# EAGLE board so2walker (EAGLE 6.6.0)
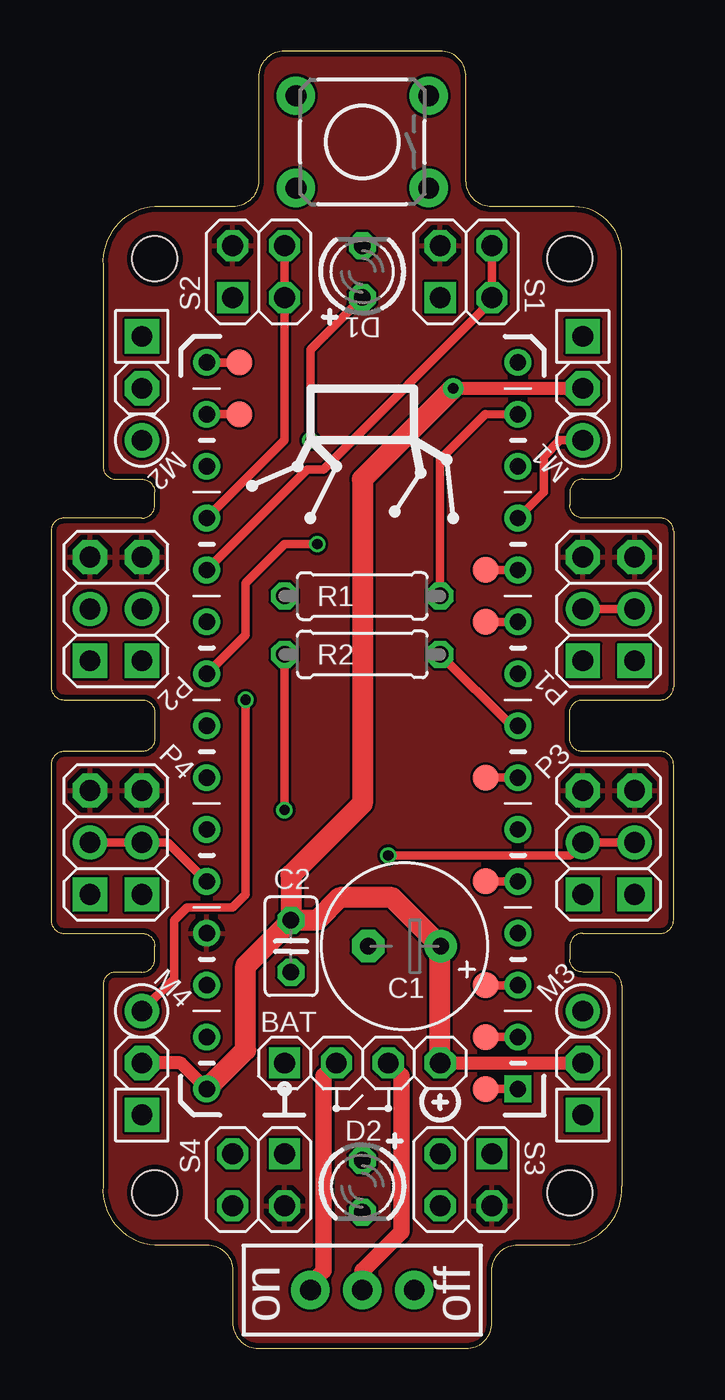
[diagram p0: board, top side]
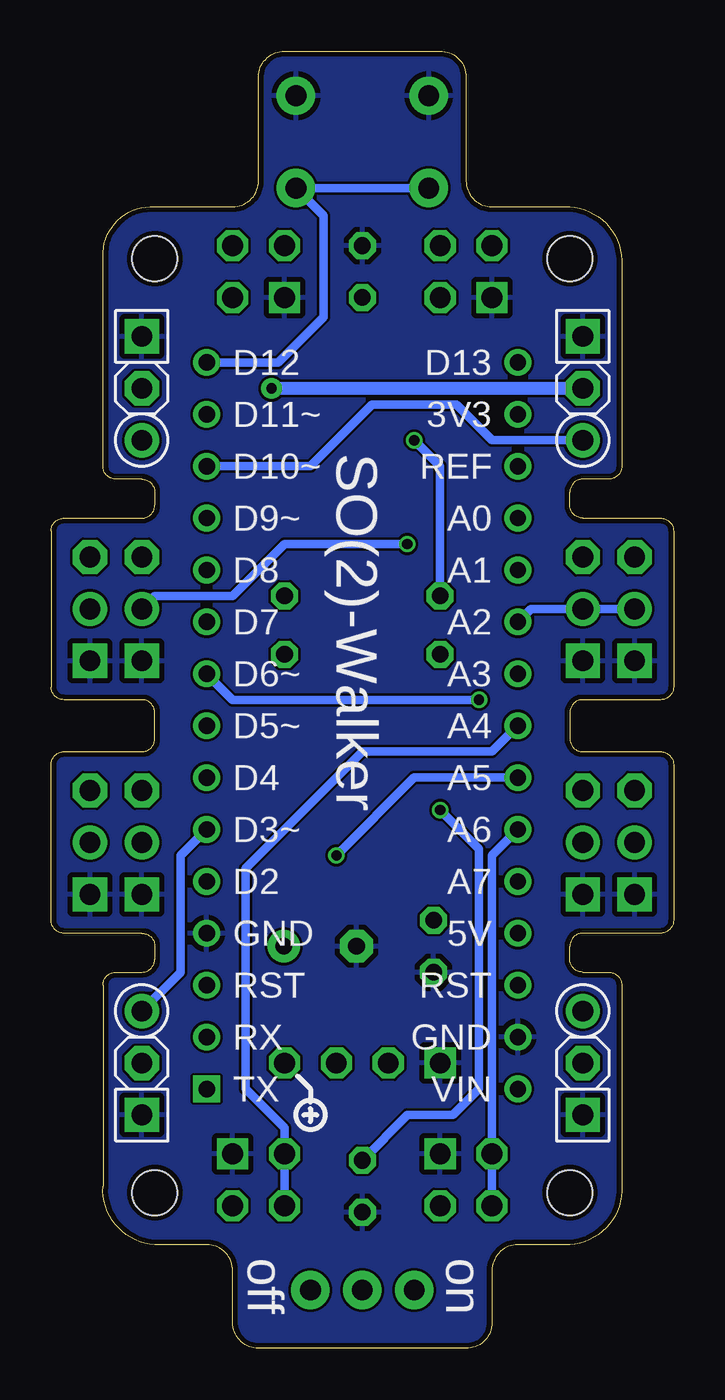
[diagram p1: board, bottom side, seen from below]

Size 30.48 x 63.5 mm. Coordinates in mm from the lower left corner, seen from the top.
Outline: 2.54,7.94 arc90 5.08,5.08 7.62,5.08 arc-90 8.89,3.81 8.89,1.27 arc90 10.16,0 20.32,0 arc90 21.59,1.27 21.59,3.81 arc-90 22.86,5.08 25.4,5.08 arc90 27.94,7.94 27.94,17.78 arc90 27.3,18.41 26.04,18.41 arc-90 25.4,19.05 25.4,19.68 arc-90 26.04,20.32 29.84,20.32 arc90 30.48,20.95 30.48,28.57 arc90 29.84,29.21 26.04,29.21 arc-90 25.4,29.84 25.4,31.11 arc-90 26.04,31.75 29.84,31.75 arc90 30.48,32.38 30.48,40.01 arc90 29.84,40.64 26.04,40.64 arc-90 25.4,41.27 25.4,41.91 arc-90 26.04,42.55 27.3,42.55 arc90 27.94,43.18 27.94,53.66 arc90 25.4,55.88 21.59,55.88 arc-90 20.32,57.15 20.32,62.23 arc90 19.05,63.5 11.43,63.5 arc90 10.16,62.23 10.16,57.15 arc-90 8.89,55.88 5.08,55.88 arc90 2.54,53.02 2.54,43.18 arc90 3.17,42.55 4.45,42.55 arc-90 5.08,41.91 5.08,41.27 arc-90 4.45,40.64 0.64,40.64 arc90 0,40.01 0,32.38 arc90 0.64,31.75 4.45,31.75 arc-90 5.08,31.11 5.08,29.84 arc-90 4.45,29.21 0.64,29.21 arc90 0,28.57 0,20.95 arc90 0.64,20.32 4.45,20.32 arc-90 5.08,19.68 5.08,19.05 arc-90 4.45,18.41 3.17,18.41 arc90 2.54,17.78 2.54,7.94
Copper layers (1*16): Top 0.035mm / dielectric 1.5mm / Bottom 0.035mm
Design rules "dirt_cheap_dirty_boards.v1": minimum track width 5mil, minimum drill 12mil, track to track 5mil, track to pad 5mil, pad to pad 5mil, via to via 5mil, smd to smd 0mil, copper to edge 10mil, drill to drill 10mil, minimum pad ring 10mil, minimum via ring 6mil, stop-mask expansion 2mil, vias tented up to drill 25mil, thermal gap 10mil
Holes 2.2 mm at 25.4,53.34 5.08,53.34 25.4,7.62 5.08,7.62

## Footprints (pad centres in the part's own frame; a part is rotated, then mirrored left to right if it is on the bottom)
1X04-S = drill 1.016 square: 1 -3.81,0 | drill 1.016 octagon: 2 -1.27,0; 3 1.27,0; 4 3.81,0
E3,5-8 = drill 0.813 pad 1.6: + -1.778,0 | drill 0.813 pad 1.6 octagon: - 1.778,0
C025-025X050 = drill 0.813 octagon: 1 -1.27,0; 2 1.27,0
LED3MM = drill 0.813 octagon: A -1.27,0; K 1.27,0
1X03-S = drill 1.016 pad 1.676: DAT 2.54,0 | drill 1.016 pad 1.676 square: GND -2.54,0 | drill 1.016 pad 1.676 octagon: V+ 0,0
NANOSHLD_INV = drill 0.8 square: 1 7.62,-19.05 | drill 0.8: 2 7.62,-16.51; 3 7.62,-13.97; 4 7.62,-11.43; 5 7.62,-8.89; 6 7.62,-6.35; 7 7.62,-3.81; 8 7.62,-1.27; 9 7.62,1.27; 10 7.62,3.81; 11 7.62,6.35; 12 7.62,8.89; 13 7.62,11.43; 14 7.62,13.97; 15 7.62,16.51; 16 -7.62,16.51; 17 -7.62,13.97; 18 -7.62,11.43; 19 -7.62,8.89; 20 -7.62,6.35; 21 -7.62,3.81; 22 -7.62,1.27; 23 -7.62,-1.27; 24 -7.62,-3.81; 25 -7.62,-6.35; 26 -7.62,-8.89; 27 -7.62,-11.43; 28 -7.62,-13.97; 29 -7.62,-16.51; 30 -7.62,-19.05
UNIPOT_DIL = drill 1.016 pad 1.676 square: 1A -2.54,-1.27; 1B -2.54,1.27 | drill 1.016 pad 1.676: 2A 0,-1.27; 2B 0,1.27 | drill 1.016 pad 1.676 octagon: 3A 2.54,-1.27; 3B 2.54,1.27
0207/7 = drill 0.813 octagon: 1 -3.81,0; 2 3.81,0
2X02 = drill 1.016 square: 1 -1.27,-1.27 | drill 1.016 octagon: 2 -1.27,1.27; 3 1.27,-1.27; 4 1.27,1.27
SWITCH-SPDT = drill 1.016 pad 1.88: 1 0,2.54; 2 0,0; 3 0,-2.54
TACTILE-PTH = drill 1.016 pad 1.88: 1 -3.251,2.261; 2 3.251,2.261; 3 -3.251,-2.261; 4 3.251,-2.261
B1,27 = smd 1.27 x 1.27: TP 0,0

## Placement (x,y rotation side)
BAT  [1X04-S]  15.24,13.97 0 top
C1  100µF  [E3,5-8]  17.3,19.68 180 top
C2  100nF  [C025-025X050]  11.75,19.68 270 top
D1  [LED3MM]  15.24,52.7 90 top
D2  [LED3MM]  15.24,7.94 270 top
M1  SERVO  [1X03-S]  26.04,46.99 270 top
M2  SERVO  [1X03-S]  4.45,46.99 270 top
M3  SERVO  [1X03-S]  26.04,13.97 90 top
M4  SERVO  [1X03-S]  4.45,13.97 90 top
MOD1  Arduino Nano  [NANOSHLD_INV]  15.24,31.75 0 top
P1  [UNIPOT_DIL]  27.3,36.2 90 top
P2  [UNIPOT_DIL]  3.17,36.2 90 top
P3  [UNIPOT_DIL]  27.3,24.77 90 top
P4  [UNIPOT_DIL]  3.17,24.77 90 top
R1  1K  [0207/7]  15.24,36.83 0 top
R2  1K  [0207/7]  15.24,33.97 0 top
S1  [2X02]  20.32,52.7 0 top
S2  [2X02]  10.16,52.7 0 top
S3  [2X02]  20.32,8.25 180 top
S4  [2X02]  10.16,8.25 180 top
SW  [SWITCH-SPDT]  15.24,2.86 270 top
T1  [TACTILE-PTH]  15.24,59.05 180 top
TP1  TPB1,27  [B1,27]  21.27,12.7 0 top
TP2  TPB1,27  [B1,27]  21.27,15.24 0 top
TP3  TPB1,27  [B1,27]  21.27,17.78 0 top
TP4  TPB1,27  [B1,27]  21.27,22.86 0 top
TP5  TPB1,27  [B1,27]  21.27,27.94 0 top
TP6  TPB1,27  [B1,27]  21.27,35.56 0 top
TP7  TPB1,27  [B1,27]  21.27,38.1 0 top
TP8  TPB1,27  [B1,27]  9.21,48.26 0 top
TP9  TPB1,27  [B1,27]  9.21,45.72 0 top

## Library data of the parts
BAT S1-S4 = pinhead-2
C1 C2 R1 R2 = rcl
D1 D2 = led
M1-M4 MOD1 P1-P4 = supreme
SW T1 = SparkFun
TP1-TP9 = testpad

## Nets
+5V: MOD1.27 P1.3A P1.3B P2.3A P2.3B P3.3A P3.3B P4.3A P4.3B S1.2 S2.2 S3.2 S4.2
D2: MOD1.5 TP4.TP
D4: MOD1.7 TP5.TP
D7: MOD1.10 TP6.TP
D8: MOD1.11 TP7.TP
D12: MOD1.15 T1.1 T1.2
D13: MOD1.16 TP8.TP
GND: BAT.1 C1.- C2.2 D1.K D2.K M1.GND M2.GND M3.GND M4.GND MOD1.4 MOD1.29 P1.1A P1.1B P2.1A P2.1B P3.1A P3.1B P4.1A P4.1B S1.1 S2.1 S3.1 S4.1 T1.3 T1.4
N$1: MOD1.17 TP9.TP
N$2: M2.DAT MOD1.13
N$3: M3.DAT MOD1.6
N$4: M4.DAT MOD1.9
N$5: MOD1.8 R2.2
N$6: MOD1.14 R1.2
N$7: MOD1.22 P1.2A P1.2B
N$8: MOD1.21 P2.2A P2.2B
N$9: MOD1.24 P3.2A P3.2B
N$10: BAT.3 SW.2
N$11: BAT.2 SW.3
N$12: MOD1.26 P4.2A P4.2B
N$13: MOD1.19 S2.3 S2.4
N$14: MOD1.20 S1.3 S1.4
N$15: MOD1.25 S4.3 S4.4
N$16: MOD1.23 S3.3 S3.4
N$17: D1.A R1.1
N$18: D2.A R2.1
N$22: M1.DAT MOD1.12
REF: MOD1.18
RST: MOD1.3 TP3.TP
RX: MOD1.2 TP2.TP
TX: MOD1.1 TP1.TP
VCC: BAT.4 C1.+ C2.1 M1.V+ M2.V+ M3.V+ M4.V+ MOD1.30

## Tracks (layer width: path | path; a pad name or v marks a point on that pad's centre or on a via)
+5V
  pour Top: -1.91,64.14 32.7,64.14 32.38,-0.63 -2.22,-0.63
D2
  Top 0.406: TP4.TP MOD1.5
D4
  Top 0.406: TP5.TP MOD1.7
D7
  Top 0.406: TP6.TP MOD1.10
D8
  Top 0.406: TP7.TP MOD1.11
D12
  Bottom 0.406: T1.2 T1.1 17.14,55.45 17.14,50.48 19.37,48.26 MOD1.15
D13
  Top 0.406: TP8.TP MOD1.16
GND
  pour Bottom: -1.27,63.5 31.75,63.5 31.75,0 -1.27,0
N$1
  Top 0.406: MOD1.17 TP9.TP
N$2
  Bottom 0.406: MOD1.13 17.78,43.18 14.76,46.2 10.64,46.2 8.89,44.45 M2.DAT
N$3
  Bottom 0.406: MOD1.6 24.13,24.13 24.13,18.41 M3.DAT
N$4  (via drill 0.5)
  Top 0.406: v9.53,31.75 9.53,22.22 8.89,21.59 6.67,21.59 6.03,20.95 6.03,18.1 M4.DAT
  Bottom 0.406: v9.53,31.75 21.59,31.75 MOD1.9
N$5
  Top 0.406: MOD1.8 22.54,30.48 R2.2
N$6
  Top 0.4: 21.27,45.72 MOD1.14
  Top 0.406: R1.2 19.05,43.5 21.27,45.72
N$7  (via drill 0.5)
  Top 0.406: P1.2B P1.2A | MOD1.22 9.53,34.92 9.53,37.46 11.43,39.37 v13.04,39.37
  Bottom 0.406: v13.04,39.37 19.05,39.37 21.59,36.83 25.4,36.83 P1.2B
N$8
  Bottom 0.406: P2.2B P2.2A 6.99,36.2 MOD1.21
N$9  (via drill 0.5)
  Top 0.406: P3.2A P3.2B 25.4,24.13 v16.51,24.13
  Bottom 0.406: MOD1.24 12.7,27.94 v16.51,24.13
N$10
  Top 0.813: BAT.3 17.14,13.34 17.14,5.71 15.24,3.81 SW.2
N$11
  Top 0.813: BAT.2 13.34,13.34 13.34,3.81 12.7,3.17 SW.3
N$12
  Top 0.406: P4.2B P4.2A 5.71,24.77 MOD1.26
N$13
  Top 0.406: S2.4 S2.3 11.43,44.45 MOD1.19
N$14
  Top 0.406: S1.4 S1.3 21.59,51.28 13.34,43.02 12.54,43.02 MOD1.20
N$15
  Bottom 0.406: S4.4 S4.3 8.89,24.13 MOD1.25
N$16
  Bottom 0.406: S3.4 S3.3 19.05,10.8 20.95,12.7 20.95,23.49 15.24,29.21 8.89,29.21 MOD1.23
N$17  (via drill 0.5)
  Top 0.406: v12.7,44.45 12.7,48.89 D1.A
  Bottom 0.406: R1.1 11.43,43.18 v12.7,44.45
N$18  (via drill 0.5)
  Top 0.406: v11.43,26.35 R2.1
  Bottom 0.406: D2.A 13.02,11.43 10.79,11.43 9.53,12.7 9.53,24.45 v11.43,26.35
N$22
  Top 0.4: 24.13,41.91 MOD1.12
  Top 0.406: 24.13,41.91 24.13,43.66 24.92,44.45 M1.DAT
RST
  Top 0.406: MOD1.3 TP3.TP
RX
  Top 0.406: MOD1.2 TP2.TP
TX
  Top 0.406: MOD1.1 TP1.TP
VCC  (via drill 0.5 pad 1.02)
  Top 0.635: BAT.4 M3.V+ | MOD1.30 6.35,13.97 M4.V+ | M1.V+ v19.68,46.99
  Top 1.016: C2.1 13.02,20.95 14.13,22.07 16.7,22.07 C1.+ 19.05,19.65 BAT.4 | MOD1.30 9.53,14.61 9.53,18.73 C2.1 | v19.68,46.99 15.24,42.55 15.24,26.67 11.75,23.18 C2.1
  Bottom 0.635: M2.V+ v19.68,46.99

## Text on the board
tPlace: on | off
bPlace: SO(2)-Walker | on | off
Reference: SO(2)-Walker rev 1 / / Matthias Kubisch / May 31st 2019 / / Creative Commons / 3.0 CC-BY-SA